# EAGLE board papilio_cam_board (EAGLE 6.2)
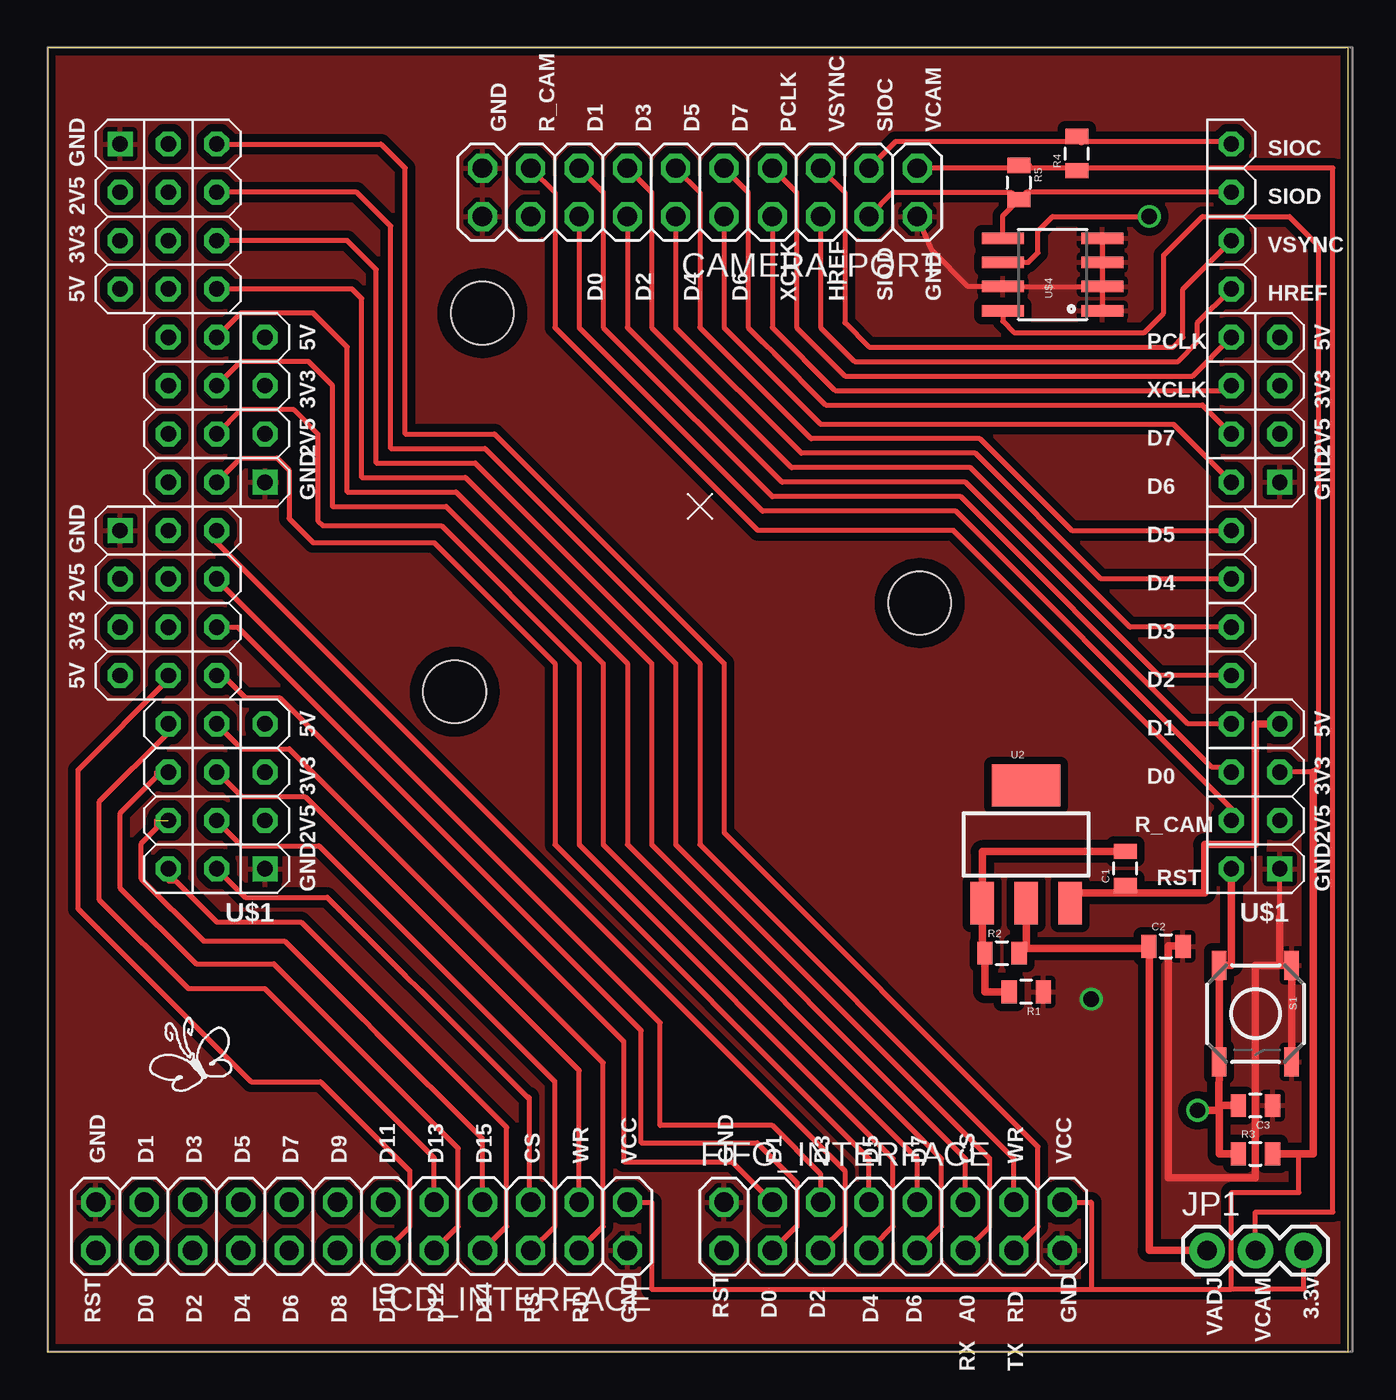
[diagram p0: board, top side]
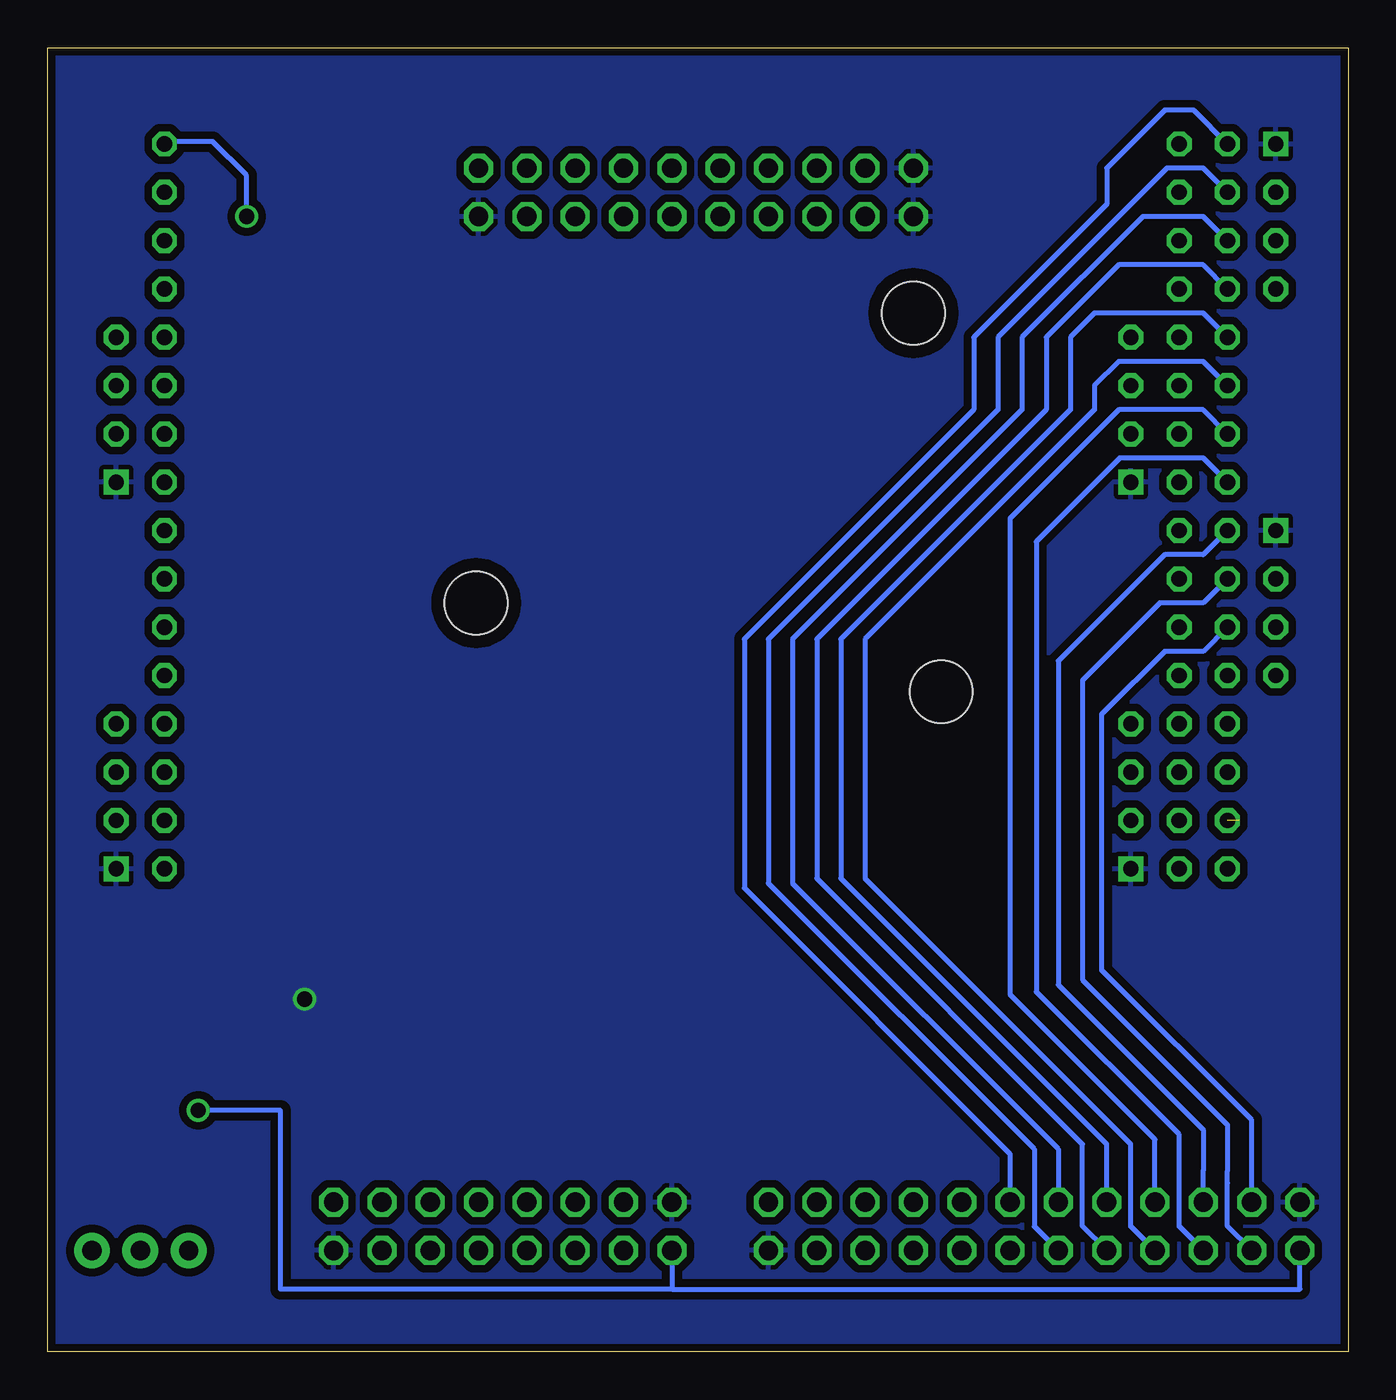
[diagram p1: board, bottom side, seen from below]

Size 68.38 x 68.57 mm. Coordinates in mm from the lower left corner, seen from the top.
Outline: 0,0 68.38,0 68.38,68.57 0,68.57 0,0
Copper layers (1*16): Top 0.035mm / dielectric 1.5mm / Bottom 0.035mm
Design rules: minimum track width 6mil, minimum drill 12mil, track to track 6mil, track to pad 6mil, pad to pad 6mil, via to via 6mil, smd to smd 0mil, copper to edge 10mil, drill to drill 10mil, minimum pad ring 10mil, minimum via ring 6mil, stop-mask expansion 2mil, vias tented up to drill 100mil, thermal gap 10mil

## Footprints (pad centres in the part's own frame; a part is rotated, then mirrored left to right if it is on the bottom)
0805 = smd 0.8 x 1.2: 1 -0.9,0; 2 0.9,0
2X10 = drill 1.016 octagon: 1 -11.43,-1.27; 2 -11.43,1.27; 3 -8.89,-1.27; 4 -8.89,1.27; 5 -6.35,-1.27; 6 -6.35,1.27; 7 -3.81,-1.27; 8 -3.81,1.27; 9 -1.27,-1.27; 10 -1.27,1.27; 11 1.27,-1.27; 12 1.27,1.27; 13 3.81,-1.27; 14 3.81,1.27; 15 6.35,-1.27; 16 6.35,1.27; 17 8.89,-1.27; 18 8.89,1.27; 19 11.43,-1.27; 20 11.43,1.27
2X08 = drill 1.016 octagon: 1 -8.89,-1.27; 2 -8.89,1.27; 3 -6.35,-1.27; 4 -6.35,1.27; 5 -3.81,-1.27; 6 -3.81,1.27; 7 -1.27,-1.27; 8 -1.27,1.27; 9 1.27,-1.27; 10 1.27,1.27; 11 3.81,-1.27; 12 3.81,1.27; 13 6.35,-1.27; 14 6.35,1.27; 15 8.89,-1.27; 16 8.89,1.27
1X03 = drill 1.016 pad 1.88: 1 0,0; 2 2.54,0; 3 5.08,0
STAND-OFF = hole 3.302: 0,0
2X12 = drill 1.016 octagon: 1 -13.97,-1.27; 2 -13.97,1.27; 3 -11.43,-1.27; 4 -11.43,1.27; 5 -8.89,-1.27; 6 -8.89,1.27; 7 -6.35,-1.27; 8 -6.35,1.27; 9 -3.81,-1.27; 10 -3.81,1.27; 11 -1.27,-1.27; 12 -1.27,1.27; 13 1.27,-1.27; 14 1.27,1.27; 15 3.81,-1.27; 16 3.81,1.27; 17 6.35,-1.27; 18 6.35,1.27; 19 8.89,-1.27; 20 8.89,1.27; 21 11.43,-1.27; 22 11.43,1.27; 23 13.97,-1.27; 24 13.97,1.27
TACTILE_SWITCH_SMD = smd 1.524 x 0.762: 1 -2.54,1.905; 2 2.54,1.905; 3 -2.54,-1.905; 4 2.54,-1.905
SOT223 = smd 1.219 x 2.235: 1 -2.311,-3.099; 2 0,-3.099; 3 2.311,-3.099 | smd 3.6 x 2.2: 4 0,3.099
MEGAWING_FULL_NOHOLES_P1 = drill 0.8 octagon: A17 59.69,43.18; A18 59.69,40.64; A19 59.69,38.1; A20 59.69,35.56; A21 59.69,33.02; A22 59.69,30.48; A23 59.69,27.94; A24 59.69,25.4; A25 59.69,22.86; A26 59.69,20.32; A27 59.69,17.78; A28 59.69,15.24; A29 59.69,12.7; A30 59.69,10.16; A31 59.69,7.62; A32 59.69,5.08; A33 6.35,43.18; A34 6.35,40.64; A35 6.35,38.1; A36 6.35,35.56; A37 6.35,33.02; A38 6.35,30.48; A39 6.35,27.94; A40 6.35,25.4; A41 6.35,22.86; A42 6.35,20.32; A43 6.35,17.78; A44 6.35,15.24; A45 6.35,12.7; A46 6.35,10.16; A47 6.35,7.62; A48 6.35,5.08; B17 62.23,43.18; B18 62.23,40.64; B19 62.23,38.1; B20 62.23,35.56; B21 62.23,33.02; B22 62.23,30.48; B23 62.23,27.94; B24 62.23,25.4; B25 62.23,22.86; B26 62.23,20.32; B27 62.23,17.78; B28 62.23,15.24; B29 62.23,12.7; B30 62.23,10.16; B31 62.23,7.62; B32 62.23,5.08; W2_2V5 57.15,40.64; W2_2V5_2 64.77,27.94; W2_2V5_3 57.15,20.32; W2_2V5_4 64.77,7.62; W2_3V3 57.15,38.1; W2_3V3_2 64.77,30.48; W2_3V3_3 57.15,17.78; W2_3V3_4 64.77,10.16; W2_5V 57.15,35.56; W2_5V_2 64.77,33.02; W2_5V_3 57.15,15.24; W2_5V_4 64.77,12.7; W3_2V5 3.81,40.64; W3_2V5_2 3.81,20.32; W3_3V3 3.81,38.1; W3_3V3_2 3.81,17.78; W3_5V 3.81,35.56; W3_5V_2 3.81,15.24 | drill 0.8 square: W2_GND 57.15,43.18; W2_GND_2 64.77,25.4; W2_GND_3 57.15,22.86; W2_GND_4 64.77,5.08; W3_GND 3.81,43.18; W3_GND_2 3.81,22.86
SO08 = smd 0.61 x 2.21: 1 -1.905,-2.616; 2 -0.635,-2.616; 3 0.635,-2.616; 4 1.905,-2.616; 5 1.905,2.616; 6 0.635,2.616; 7 -0.635,2.616; 8 -1.905,2.616

## Placement (x,y rotation side)
C1  [0805]  56.65,25.41 90 top
C2  [0805]  58.79,21.33 0 top
C3  [0805]  63.5,12.95 180 top
CAMERA_PORT  [2X10]  34.29,60.96 180 top
FIFO_INTERFACE  [2X08]  44.45,6.6 0 top
JP1  [1X03]  60.96,5.33 0 top
JP2  STAND-OFF  [STAND-OFF]  21.4,34.7 0 top
JP5  STAND-OFF  [STAND-OFF]  22.86,54.61 0 top
JP7  STAND-OFF  [STAND-OFF]  45.85,39.37 0 top
LCD_INTERFACE  [2X12]  16.51,6.6 180 top
LOGO1  BUTTERFLY_LOGO  [BUTTERFLY_LOGO]  7.62,15.11 0 top
R1  [0805]  51.44,18.93 180 top
R2  [0805]  50.17,20.96 0 top
R3  [0805]  63.5,10.41 0 top
R4  [0805]  54.1,62.99 90 top
R5  [0805]  51.05,61.47 270 top
S1  [TACTILE_SWITCH_SMD]  63.5,17.78 270 top
U2  V_REG_317SMD  [SOT223]  51.44,26.68 0 top
U$1  MEGAWING_FULL_P1MEGAWING_P1  [MEGAWING_FULL_NOHOLES_P1]  68.58,68.58 180 top
U$4  EEPROM-I2CSMD  [SO08]  52.83,56.64 90 top

## Library data of the parts
C1-C3 JP1 JP2 JP5 JP7 R1-R5 S1 U2 U$4 = SparkFun
CAMERA_PORT FIFO_INTERFACE LCD_INTERFACE = pinhead
LOGO1 U$1 = Papilio

## Nets
3.3V: FIFO_INTERFACE.16 JP1.3 LCD_INTERFACE.1 R3.2 U$1.W3_3V3 U$4.8
5V: C1.1 U2.3 U$1.W3_5V
A0: FIFO_INTERFACE.5 U$1.A24
D0: CAMERA_PORT.16 U$1.A35
D1: CAMERA_PORT.15 U$1.A36
D2: CAMERA_PORT.14 U$1.A37
D3: CAMERA_PORT.13 U$1.A38
D4: CAMERA_PORT.12 U$1.A39
D5: CAMERA_PORT.11 U$1.A40
D6: CAMERA_PORT.10 U$1.A41
D7: CAMERA_PORT.9 U$1.A42
FIFO_CS: FIFO_INTERFACE.6 U$1.A23
FIFO_D0: FIFO_INTERFACE.13 U$1.A32
FIFO_D1: FIFO_INTERFACE.14 U$1.A31
FIFO_D2: FIFO_INTERFACE.11 U$1.A30
FIFO_D3: FIFO_INTERFACE.12 U$1.A29
FIFO_D4: FIFO_INTERFACE.9 U$1.A28
FIFO_D5: FIFO_INTERFACE.10 U$1.A27
FIFO_D6: FIFO_INTERFACE.7 U$1.A26
FIFO_D7: FIFO_INTERFACE.8 U$1.A25
FIFO_RD: FIFO_INTERFACE.3 U$1.A22
FIFO_WR: FIFO_INTERFACE.4 U$1.A21
GND: C2.2 C3.1 CAMERA_PORT.2 CAMERA_PORT.19 CAMERA_PORT.20 FIFO_INTERFACE.2 FIFO_INTERFACE.15 LCD_INTERFACE.2 LCD_INTERFACE.23 R1.1 S1.1 S1.2 U$1.W2_GND U$1.W2_GND_2 U$1.W2_GND_3 U$1.W2_GND_4 U$1.W3_GND U$1.W3_GND_2 U$4.1 U$4.2 U$4.3 U$4.4 U$4.7
HREF: CAMERA_PORT.6 U$1.A45
LCD_CS: LCD_INTERFACE.6 U$1.A18
LCD_D00: LCD_INTERFACE.21 U$1.B22
LCD_D01: LCD_INTERFACE.22 U$1.B23
LCD_D02: LCD_INTERFACE.19 U$1.B24
LCD_D03: LCD_INTERFACE.20 U$1.B25
LCD_D04: LCD_INTERFACE.17 U$1.B26
LCD_D05: LCD_INTERFACE.18 U$1.B27
LCD_D06: LCD_INTERFACE.15 U$1.B28
LCD_D07: LCD_INTERFACE.16 U$1.B29
LCD_D08: LCD_INTERFACE.13 U$1.B30
LCD_D09: LCD_INTERFACE.14 U$1.B31
LCD_D10: LCD_INTERFACE.11 U$1.B32
LCD_D11: LCD_INTERFACE.12 U$1.B21
LCD_D12: LCD_INTERFACE.9 U$1.B20
LCD_D13: LCD_INTERFACE.10 U$1.B19
LCD_D14: LCD_INTERFACE.7 U$1.B18
LCD_D15: LCD_INTERFACE.8 U$1.B17
LCD_RD: LCD_INTERFACE.3 U$1.A19
LCD_RS: LCD_INTERFACE.5 U$1.A17
LCD_WR: LCD_INTERFACE.4 U$1.A20
N$1: C1.2 R1.2 R2.1 U2.1
PCLK: CAMERA_PORT.7 U$1.A44
RESET: C3.2 FIFO_INTERFACE.1 LCD_INTERFACE.24 R3.1 S1.3 S1.4 U$1.A33
RESET_CAM: CAMERA_PORT.17 U$1.A34
SIOC: CAMERA_PORT.3 R4.2 U$1.A48 U$4.6
SIOD: CAMERA_PORT.4 R5.2 U$1.A47 U$4.5
VADJ: C2.1 JP1.1 R2.2 U2.2
VCAM: CAMERA_PORT.1 JP1.2 R4.1 R5.1
VSYNC: CAMERA_PORT.5 U$1.A46
XCLK: CAMERA_PORT.8 U$1.A43

## Tracks (layer width: path | path; a pad name or v marks a point on that pad's centre or on a via)
3.3V
  Top 0.254: LCD_INTERFACE.1 31.75,7.87 31.75,3.3 54.86,3.3 | 54.86,3.3 62.23,3.3 | 62.23,3.3 62.23,8.38 65.79,8.38 65.79,10.3 R3.2 | U$1.W3_3V3 66.55,30.48 66.8,30.73 66.8,58.17 65.28,59.69 60.71,59.69 58.67,57.66 58.67,54.61 57.66,53.59 50.8,53.59 50.22,54.18 U$4.8 | FIFO_INTERFACE.16 54.86,7.87 54.86,3.3 | 62.23,3.3 66.04,3.3 JP1.3
  Top 0.406: R3.2 66.55,10.41 66.55,30.48
5V
  Top 0.406: U$1.W3_5V 63.5,33.02 63.5,26.67 60.83,26.67 60.83,24.13 56.65,24.13 C1.1 56.78,24.51 56.78,24.14 53.76,24.14 U2.3
A0
  Top 0.254: FIFO_INTERFACE.5 41.91,6.6 41.91,9.53 8.89,42.55 U$1.A24
D0
  Top 0.254: U$1.A35 62.23,30.73 61.21,30.73 47.75,44.2 37.59,44.2 27.94,53.85 CAMERA_PORT.16
D1
  Top 0.254: U$1.A36 59.94,33.02 48.01,44.96 38.1,44.96 30.1,52.96 29.97,53.09 29.21,53.85 29.21,60.96 CAMERA_PORT.15
D2
  Top 0.254: U$1.A37 58.42,35.56 48.26,45.72 38.61,45.72 30.48,53.85 CAMERA_PORT.14
D3
  Top 0.254: U$1.A38 56.9,38.1 48.51,46.48 39.12,46.48 33.02,52.58 32.51,53.09 31.75,53.85 31.75,60.96 CAMERA_PORT.13
D4
  Top 0.254: U$1.A39 55.37,40.64 48.77,47.24 39.62,47.24 33.02,53.85 CAMERA_PORT.12
D5
  Top 0.254: U$1.A40 53.85,43.18 49.02,48.01 40.13,48.01 35.18,52.96 35.05,53.09 34.29,53.85 34.29,60.96 CAMERA_PORT.11
D6
  Top 0.254: 61.98,45.72 U$1.A41 59.18,48.77 40.64,48.77 35.56,53.85 CAMERA_PORT.10
D7
  Top 0.254: U$1.A42 60.71,49.78 40.89,49.78 38.23,52.45 37.59,53.09 36.83,53.85 36.83,60.96 CAMERA_PORT.9
FIFO_CS
  Top 0.254: FIFO_INTERFACE.6 40.64,9.36 38.1,11.9 32.2,11.9 32.2,17.3 8.95,40.55 8.95,40.7 U$1.A23
FIFO_D0
  Top 0.254: U$1.A32 17.53,63.5 18.8,62.23 18.8,48.26 23.5,48.26 35.56,36.2 35.56,27.3 52.07,10.79 52.07,6.6 FIFO_INTERFACE.13
FIFO_D1
  Top 0.254: FIFO_INTERFACE.14 50.8,10.16 34.29,26.67 34.29,36.2 22.99,47.5 18.03,47.5 18.03,59.18 16.26,60.96 U$1.A31
FIFO_D2
  Top 0.254: FIFO_INTERFACE.11 49.53,6.6 49.53,10.16 33.02,26.67 33.02,36.2 22.48,46.74 17.27,46.74 17.27,56.9 15.75,58.42 U$1.A30
FIFO_D3
  Top 0.254: FIFO_INTERFACE.12 48.26,10.16 31.75,26.67 31.75,36.2 21.97,45.97 16.51,45.97 16.51,55.37 16,55.88 U$1.A29
FIFO_D4
  Top 0.254: FIFO_INTERFACE.9 46.99,6.6 46.99,10.16 30.48,26.67 30.48,36.2 21.46,45.21 15.75,45.21 15.75,52.83 13.97,54.61 10.16,54.61 U$1.A28
FIFO_D5
  Top 0.254: FIFO_INTERFACE.10 45.72,10.16 29.21,26.67 29.21,36.2 20.95,44.45 14.99,44.45 14.99,50.8 13.72,52.07 10.16,52.07 U$1.A27
FIFO_D6
  Top 0.254: FIFO_INTERFACE.7 43.43,5.33 43.43,5.59 44.45,6.6 44.45,10.16 27.94,26.67 27.94,36.2 20.7,43.43 14.48,43.43 14.22,43.69 14.22,48.26 12.95,49.53 10.16,49.53 U$1.A26
FIFO_D7
  Top 0.254: FIFO_INTERFACE.8 43.18,10.16 26.67,26.67 26.67,36.2 20.32,42.55 13.97,42.55 12.7,43.81 12.7,46.35 12.06,46.99 10.16,46.99 U$1.A25
FIFO_RD
  Top 0.254: FIFO_INTERFACE.3 39.37,6.6 39.4,6.6 39.4,8.9 37.3,11 31.2,11 31.2,16.9 10,38.1 U$1.A22
FIFO_WR
  Top 0.254: FIFO_INTERFACE.4 35.97,10 30.3,10 30.3,16.3 12.2,34.4 10.4,34.4 9.24,35.56 U$1.A21
GND  (via drill 0.8)
  Top 0.254: 64.77,22.86 U$1.W3_GND | CAMERA_PORT.2 46.48,57.91 48.39,56.01 U$4.7 U$4.2 | U$4.4 U$4.3 U$4.2 | U$4.2 U$4.1
  Top 0.406: S1.2 S1.1 64.77,20.32 | 64.77,20.32 64.77,22.86 | 64.77,20.32 63.5,20.32 63.5,9.14 58.93,9.14 58.93,21.34 C2.2
  other vias: 54.86,18.54
  pour Bottom (isolate 0.406): 0.25,68.83 68.58,68.83 68.58,-0.25 0,-0.25 0,69.09
  pour Top (isolate 0.406): 0,68.58 68.58,68.58 68.58,-0.64 0,-0.64
HREF
  Top 0.254: U$1.A45 60.45,54.1 60.45,53.09 59.44,52.07 42.42,52.07 41.66,52.83 41.4,53.09 40.64,53.85 CAMERA_PORT.6
LCD_CS
  Top 0.254: LCD_INTERFACE.6 26.67,6.6 26.67,14.2 14.27,26.6 10.2,26.6 8.94,27.86 8.94,27.94 U$1.A18
LCD_D00
  Bottom 0.254: U$1.B22 7.62,36.83 9.65,36.83 12.83,33.66 12.95,33.53 12.95,20.07 5.08,12.19 LCD_INTERFACE.21
LCD_D01
  Bottom 0.254: LCD_INTERFACE.22 6.35,6.6 6.35,8.89 6.35,9.53 6.35,11.94 13.97,19.56 13.97,35.31 9.91,39.37 7.62,39.37 U$1.B23
LCD_D02
  Bottom 0.254: U$1.B24 7.62,41.91 9.65,41.91 15.24,36.32 15.24,19.3 7.62,11.68 7.62,9.53 7.62,8.38 LCD_INTERFACE.19
LCD_D03
  Bottom 0.254: LCD_INTERFACE.20 8.89,6.6 8.89,11.43 16.4,18.94 16.4,42.6 12.01,46.99 7.62,46.99 U$1.B25
LCD_D04
  Bottom 0.254: U$1.B26 7.62,49.53 12.06,49.53 17.78,43.81 17.78,18.8 10.16,11.18 LCD_INTERFACE.17
LCD_D05
  Bottom 0.254: LCD_INTERFACE.18 11.43,6.6 11.43,10.92 25.4,24.89 25.4,37.47 13.34,49.53 13.34,50.8 12.06,52.07 7.62,52.07 U$1.B27
LCD_D06
  Bottom 0.254: U$1.B28 7.62,54.61 13.34,54.61 14.61,53.34 14.61,49.53 26.67,37.47 26.67,24.89 12.7,10.92 LCD_INTERFACE.15
LCD_D07
  Bottom 0.254: LCD_INTERFACE.16 13.97,6.6 13.97,10.92 27.94,24.89 27.94,37.47 15.88,49.53 15.88,53.34 12.06,57.15 7.62,57.15 U$1.B29
LCD_D08
  Bottom 0.254: U$1.B30 7.62,59.69 10.79,59.69 17.14,53.34 17.14,49.53 29.21,37.47 29.21,24.64 15.24,10.67 LCD_INTERFACE.13
LCD_D09
  Bottom 0.254: LCD_INTERFACE.14 16.51,6.6 16.51,10.67 30.48,24.64 30.48,37.47 18.41,49.53 18.41,53.34 9.53,62.23 7.62,62.23 U$1.B31
LCD_D10
  Bottom 0.254: U$1.B32 8.13,65.28 9.65,65.28 12.7,62.23 12.7,60.33 19.68,53.34 19.68,49.53 31.75,37.47 31.75,24.38 17.78,10.41 LCD_INTERFACE.11
LCD_D11
  Top 0.254: LCD_INTERFACE.12 19.05,6.6 19.05,9.5 14.35,14.2 10.7,14.2 1.6,23.3 1.6,30.6 6.35,35.35 U$1.B21
LCD_D12
  Top 0.254: LCD_INTERFACE.9 20.32,10.2 15.56,14.96 15.22,15.3 11.42,19.1 7.4,19.1 2.7,23.8 2.7,28.9 6.35,32.55 U$1.B20
LCD_D13
  Top 0.254: LCD_INTERFACE.10 21.59,6.6 21.59,10.7 11.89,20.4 7.8,20.4 3.8,24.4 3.8,28.3 5.71,30.21 5.71,30.48 U$1.B19
LCD_D14  (1 unrouted)
  Top 0.254: LCD_INTERFACE.7 22.86,11.2 17.28,16.78 16.56,17.5 12.46,21.6 8.2,21.6 4.9,24.9 4.9,26.7 5.71,27.52 5.71,27.94
LCD_D15
  Top 0.254: LCD_INTERFACE.8 24.13,6.6 24.13,11.8 18.41,17.52 17.33,18.6 13.33,22.6 8.9,22.6 6.74,24.77 6.35,24.77 U$1.B17
LCD_RD
  Top 0.254: LCD_INTERFACE.3 27.94,14.8 13.54,29.2 10.2,29.2 8.92,30.48 U$1.A19
LCD_RS
  Top 0.254: 25.3,13.4 25.3,13.3 | 25.3,13.3 25.3,7.97 LCD_INTERFACE.5 | U$1.A17 10.4,23.9 14.7,23.9 18.8,19.8 19.6,19 25.3,13.3
LCD_WR
  Top 0.254: LCD_INTERFACE.4 29.21,6.6 29.21,15.2 12.71,31.7 10.2,31.7 U$1.A20
N$1
  Top 0.406: C1.2 49.13,26.31 U2.1 49.13,21.22 R2.1 49.27,18.93 R1.2
PCLK
  Top 0.254: U$1.A44 60.2,51.31 41.91,51.31 40.26,52.96 40.13,53.09 39.37,53.85 39.37,60.96 CAMERA_PORT.7
RESET  (via drill 0.8)
  Top 0.406: 61.59,12.7 61.57,12.96 61.57,13.21 | 61.57,13.21 S1.4 S1.3 62.23,20.32 U$1.A33 | v60.45,12.7 61.59,12.7 | R3.1 61.59,10.41 61.59,12.7 | C3.2 61.57,12.95 61.57,13.21
  Bottom 0.254: 35.56,3.3 2.54,3.3 LCD_INTERFACE.24 | FIFO_INTERFACE.1 35.56,3.3 | 35.56,3.3 56.13,3.3 56.13,12.7 v60.45,12.7
RESET_CAM
  Top 0.254: U$1.A34 62.23,28.57 47.62,43.18 37.34,43.18 26.67,53.85 26.67,60.96 CAMERA_PORT.17
SIOC  (via drill 0.8)
  Top 0.254: U$1.A48 62.23,63.63 54.36,63.63 44.58,63.63 CAMERA_PORT.3 | v57.91,59.69 52.83,59.69 52.07,58.93 52.07,57.78 51.56,57.28 U$4.6
  Top 0.406: R4.2 54.36,63.89 54.36,63.63
  Bottom 0.254: v57.91,59.69 57.91,61.85 59.69,63.63 62.1,63.63 U$1.A48
SIOD
  Top 0.254: 62.48,60.96 U$1.A47 51.45,60.96 R5.2 | U$4.5 50.22,59.73 R5.2 | CAMERA_PORT.4 44.45,60.96 50.66,60.96 R5.2
VADJ
  Top 0.406: JP1.1 57.91,5.33 57.91,21.33 C2.1 57.93,21.22 51.44,21.22 | R2.2 51.44,21.22 | 51.44,21.22 U2.2
VCAM
  Top 0.254: JP1.2 63.5,7.37 67.56,7.37 67.56,62.23 54.1,62.23 51.56,62.23 CAMERA_PORT.1
  Top 0.406: R5.1 51.56,62.37 51.56,62.23 | R4.1 54.1,62.23
VSYNC
  Top 0.254: 61.72,58.42 U$1.A46 59.69,55.88 59.69,53.34 59.18,52.83 43.18,52.83 41.91,54.1 41.91,60.96 CAMERA_PORT.5
XCLK
  Top 0.254: 61.98,50.8 U$1.A43 61.98,50.55 41.4,50.55 38.1,53.85 CAMERA_PORT.8

## Text on the board
tPlace: GND | R_CAM | D1 | D3 | D5 | D7 | PCLK | VSYNC | SIOC | VCAM | SIOC | SIOD | VSYNC | D0 | D2 | D4 | D6 | XCLK | HREF | SIOD | GND | HREF | PCLK | XCLK | D7 | D6 | D5 | D4 | D3 | D2 | D1 | D0 | R_CAM | RST | GND | D1 | D3 | D5 | D7 | D9 | D11 | D13 | D15 | CS | WR | VCC | GND | D1 | D3 | D5 | D7 | CS | WR | VCC | VADJ | VCAM | 3.3v | RST | D0 | D2 | D4 | D6 | D8 | D10 | D12 | D14 | RS | RD | GND | RST | D0 | D2 | D4 | D6 | A0 | RD | GND | RX | TX